# Altium PCB DS18B20ConnectorBoard..PcbDoc
Units mm, origin at the board's own origin, x right, y up, seen from the top; angles counter-clockwise.
Board outline 35 x 28 mm, 2 copper layers (Top Layer, Bottom Layer); 3 components, 3 nets, 15 pads, 83 vias.
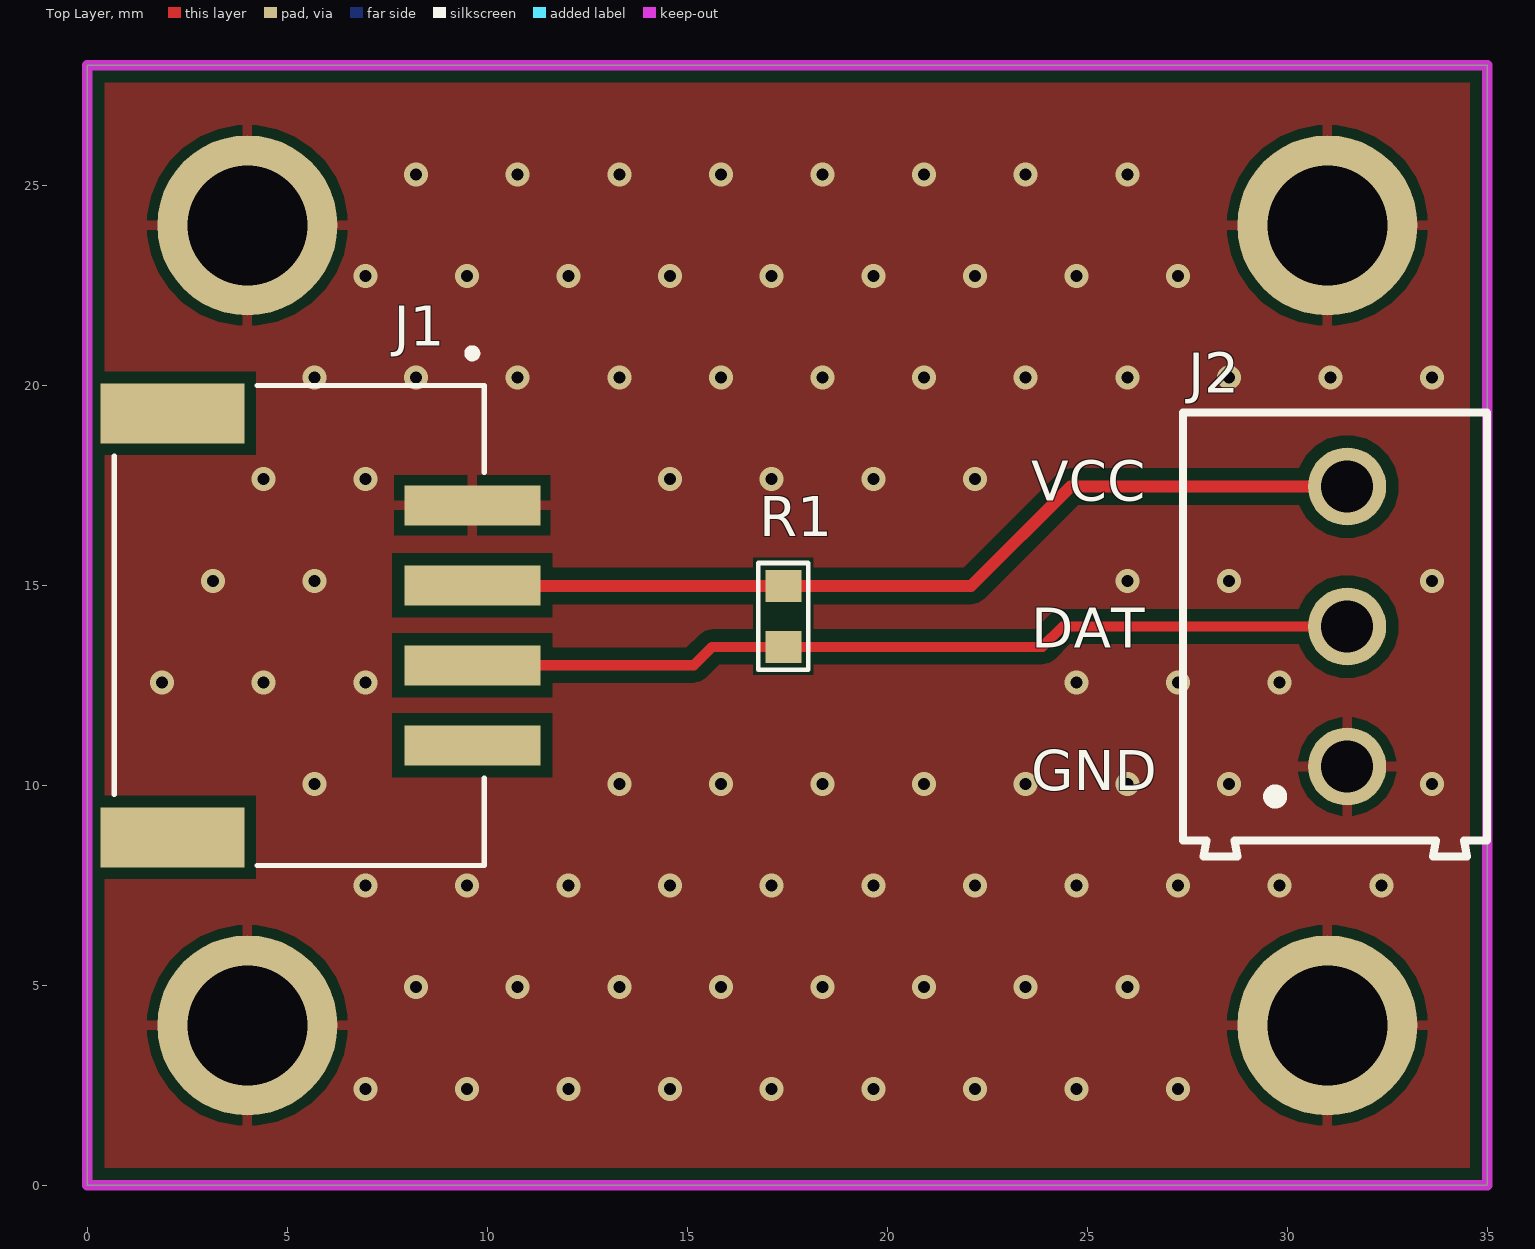
[diagram p0: Top Layer view]
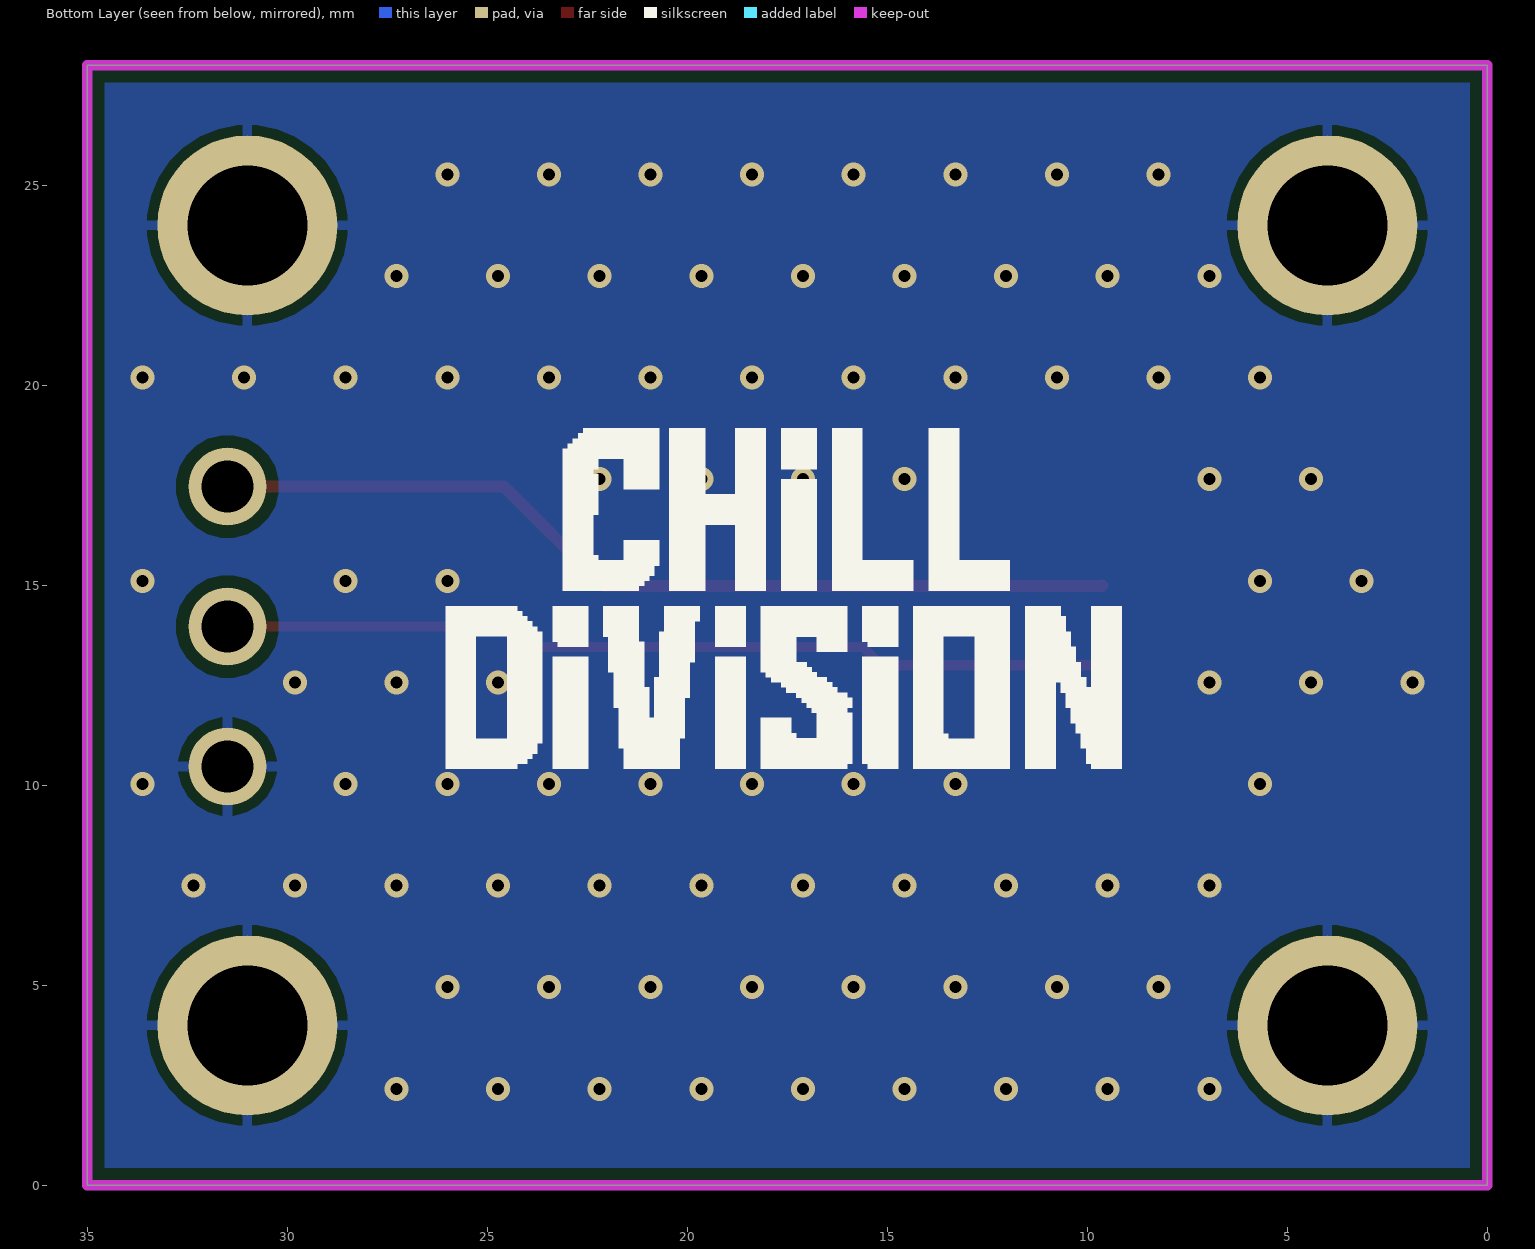
[diagram p1: Bottom Layer view, seen from below]
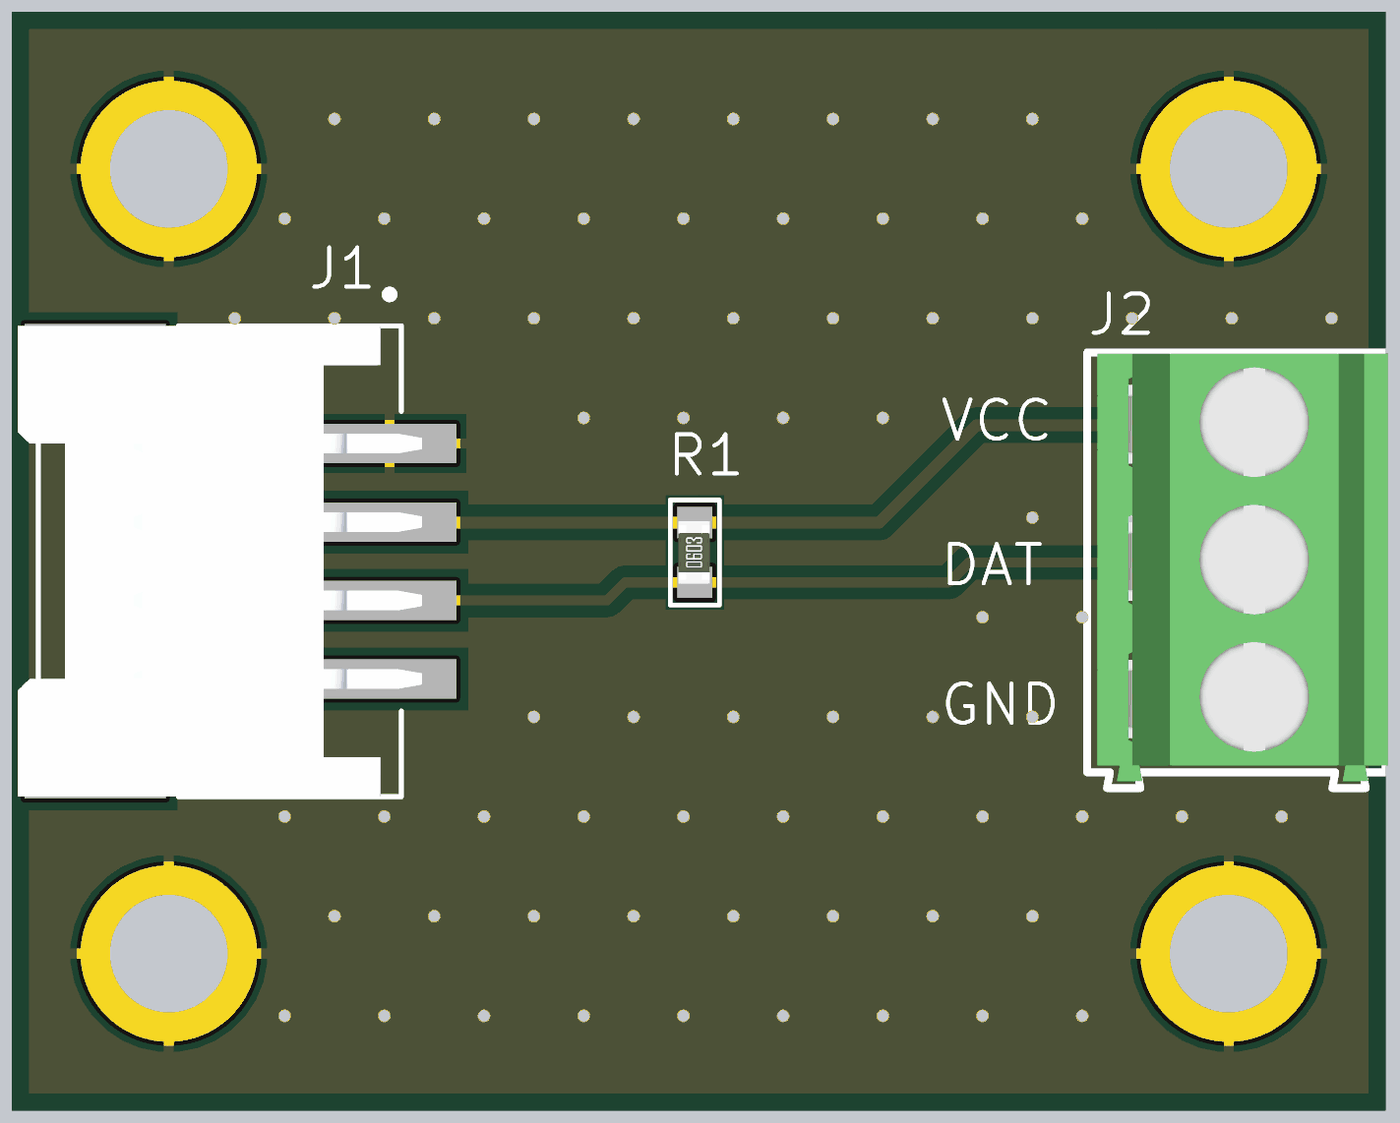
[diagram p2: 3D render of the assembled board from above, using the file's embedded part models]

## Layer stack, top to bottom
Top Solder: solder mask 0.0102, Solder Resist, Dk 3.5
Top Layer: signal copper 0.0356
Dielectric 1: dielectric 0.32, FR-4, Dk 4.8
Bottom Layer: signal copper 0.0356
Bottom Solder: solder mask 0.0102, Solder Resist, Dk 3.5

## Board outline
0,0 0,28 35,28 35,0

## Design rules (kind name [scope] priority, off if disabled: settings)
Clearance Polygon [InPoly] p1: gap=0.3 ignorepadtopadclearanceinfootprint=FALSE
Clearance [All] p2: gap=0.15 ignorepadtopadclearanceinfootprint=FALSE
HoleSize [All] p1: absolutevalues=TRUE maxlimit=5 minlimit=0.025 maxpercent=80.000 minpercent=20.000
PolygonConnect [All] p1: thpad.connectstyle=Relief thpad.reliefconductorwidth=0.254 thpad.reliefentries=4 thpad.polygonreliefangle="90 Angle" thpad.airgapwidth=0.254 smdpad.connectstyle=Relief smdpad.reliefconductorwidth=0.254 smdpad.reliefentries=4 smdpad.polygonreliefangle="90 Angle" smdpad.airgapwidth=0.254 via.connectstyle=Direct via.reliefconductorwidth=0.254 via.reliefentries=4 via.polygonreliefangle="90 Angle" via.airgapwidth=0.254
RoutingVias [All] p1: holewidth=0.711 width=1.27 viastyle="Through Hole" minholewidth=0.3 minwidth=0.6 maxholewidth=0.711 maxwidth=1.27
SolderMaskExpansion [All] p1: expansion=0.102 istentingtop=FALSE
Width [All] p1: maxlimit=1 minlimit=0.254 preferedwidth=0.254
29 further rules are at their usual default settings.

## Components (designator, comment, footprint, x,y, rotation, side; value= is the part's Value field where it differs from the comment)
J1 "GroveConnector" SEEEDSTUDIO_114020164 5.298,14 r270 top
J2 "691214110003" 691214110003 31.496,13.97 r90 top
R1 "4.7K" RES-0603 17.399,14.224 r90 top

## Footprints (in the part's own frame and the unit in brackets; to place one, negate y for a bottom-side part, rotate by r counter-clockwise, add the part's x,y. Pads: shape width x height; smd on the part's side, far side on the other; paste and mask are expansions set on the pad)
691214110003 [mm]
  round 1.95 hole 1.3: 1(-3.5,0) 2(0,0) 3(3.5,0)
  silkscreen extent -5.75,-3.5 5.35,4.1, body extent -5.58,-3.56 5.32,3.84, height 8.51
RES-0603 [mm]
  rect 0.8x0.9 smd: 1(-0.762,0) 2(0.762,0)
  silkscreen extent -1.34,-0.63 1.34,0.63, body extent -0.8,-0.38 0.8,0.42, height 0.45
SEEEDSTUDIO_114020164 [mm]
  rect 1x3.4 smd: 1(-3,4.325) 2(-1,4.325) 3(1,4.325) 4(3,4.325)
  rect 1.5x3.6 smd: SH1(-5.3,-3.175) SH2(5.3,-3.175)
  silkscreen extent -6.9,-4.62 6,4.62, body extent -6,-5.15 6,5.15, height 5.2

## Part data
J1: library part 114020164, "GROVE FEMALE HEADER R/A 20PACK", Package=None, Check_prices=https://www.snapeda.com/parts/114020164/Seeed+Technology+Co.%252C+Ltd/view-part/?ref=eda, MF="Seeed Technology Co., Ltd", MP=114020164, SnapEDA_Link=https://www.snapeda.com/parts/114020164/Seeed+Technology+Co.%252C+Ltd/view-part/?ref=snap
J2: "3 Position Wire to Board Terminal Block Horizontal with Board 0.138 (3.50mm) Through Hole", Package=None, Check_prices=https://www.snapeda.com/parts/691214110003/Wurth+Elektronik/view-part/?ref=eda, MF="Wurth Elektronik", MP=691214110003, SnapEDA_Link=https://www.snapeda.com/parts/691214110003/Wurth+Elektronik/view-part/?ref=snap
R1: library part RES

## Free pads (board coordinates)
  round 4.5 hole 3: 4(4,24) 5(31,24) 6(31,4) 7(4,4)

## Via types
v1: diameter 0.6, hole 0.3, Top Layer to Bottom Layer, tented both sides, 83 vias

## Nets (pads, with @x,y where several pads share a name; then routed paths per layer and width w, separated by ;. In a path a pad name is that pad's centre, name@x,y a point inside that pad or via, vN(x,y) a via of type N, cw(c..) or ccw(c..) an arc to the next point about the centre after c; other vN are vias at no path point)
DAT: J1.3 J2.2 R1.1 | length 22.3
  Top Layer w0.254: J1.3 15.159,13 15.621,13.462 R1.1 23.876,13.462 24.384,13.97 J2.2
GND: J1.1 J2.1 pad.4 pad.5 pad.6 pad.7
  other v1: 6.949,2.413 9.489,2.413 12.029,2.413 14.569,2.413 17.109,2.413 19.649,2.413 22.189,2.413 24.729,2.413 27.269,2.413 8.219,4.953 10.759,4.953 13.299,4.953 15.839,4.953 18.379,4.953 20.919,4.953 23.459,4.953 25.999,4.953 6.949,7.493 9.489,7.493 12.029,7.493 14.569,7.493 17.109,7.493 19.649,7.493 22.189,7.493 24.729,7.493 27.269,7.493 29.809,7.493 32.349,7.493 5.679,10.033 13.299,10.033 15.839,10.033 18.379,10.033 20.919,10.033 23.459,10.033 25.999,10.033 28.539,10.033 33.619,10.033 1.869,12.573 4.409,12.573 6.949,12.573 24.729,12.573 27.269,12.573 29.809,12.573 3.139,15.113 5.679,15.113 25.999,15.113 28.539,15.113 33.619,15.113 4.409,17.653 6.949,17.653 14.569,17.653 17.109,17.653 19.649,17.653 22.189,17.653 5.679,20.193 8.219,20.193 10.759,20.193 13.299,20.193 15.839,20.193 18.379,20.193 20.919,20.193 23.459,20.193 25.999,20.193 28.539,20.193 31.079,20.193 33.619,20.193 6.949,22.733 9.489,22.733 12.029,22.733 14.569,22.733 17.109,22.733 19.649,22.733 22.189,22.733 24.729,22.733 27.269,22.733 8.219,25.273 10.759,25.273 13.299,25.273 15.839,25.273 18.379,25.273 20.919,25.273 23.459,25.273 25.999,25.273
VCC: J1.2 J2.3 R1.2 | length 22.9
  Top Layer w0.3: J1.2 9.637,14.986 R1.2 22.098,14.986 24.582,17.47 J2.3
pads on no net: J1.4 J1.SH1 J1.SH2

## Polygon pours and split planes (outlines as drawn)
GND on Bottom Layer "GND_L02_P000" (solid, remove dead copper, pour order 0): 0,0 0,28.067 35,28.067 35,0
GND on Top Layer "GND_L01_P001" (solid, remove dead copper, pour order 1): 0,0 0,28.067 35,28.067 35,0 -0.127,0

## Keep-outs
Keep-Out Layer:
  the board outline again, w0.254

## Silkscreen, mask and mechanical layers (free items; w line width, h text height)
Top Overlay:
  text "VCC" at 23.595,17.118 h1
  text "DAT" at 23.595,13.435 h1
  text "GND" at 23.595,9.879 h1
Bottom Overlay:
  drawing of 17 lines, arcs and shapes, not listed